# EAGLE board Audio Processor (EAGLE 5.06)
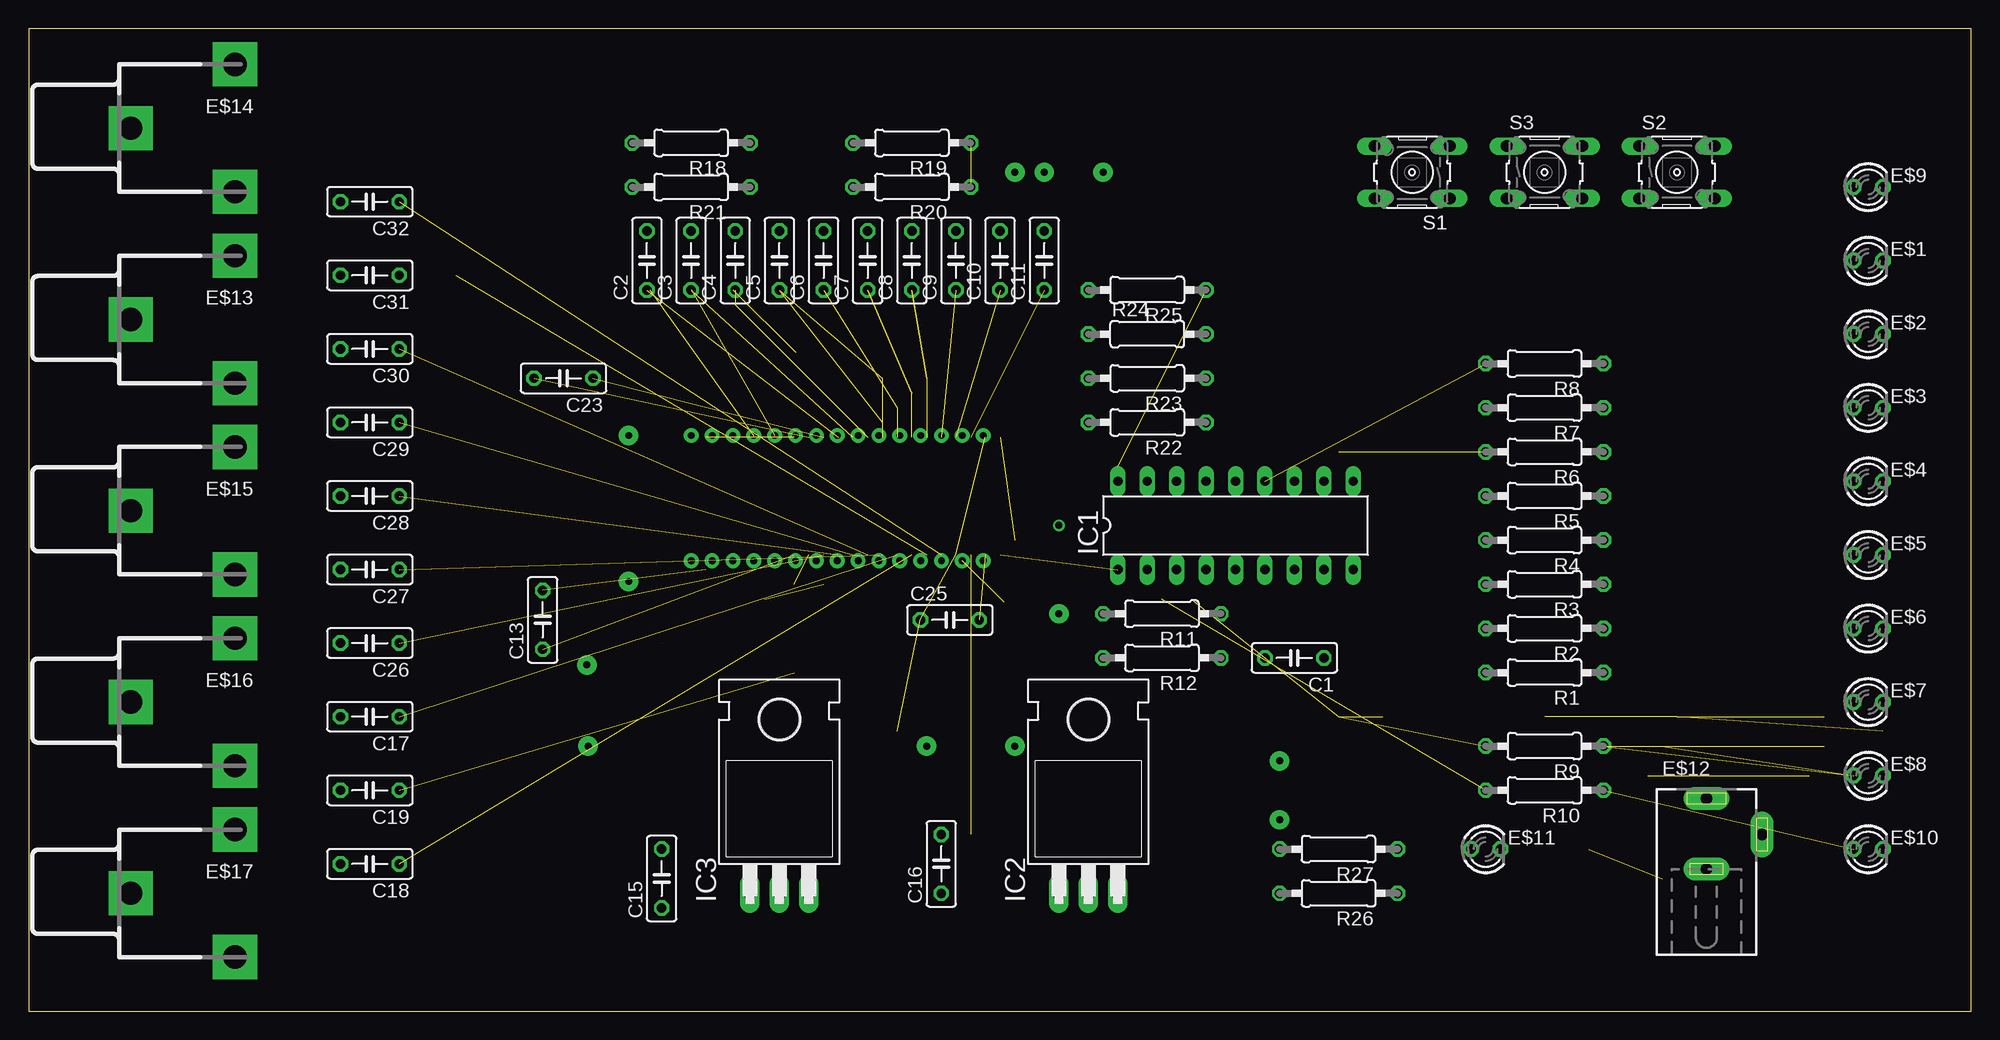
[diagram p0: board, top side]
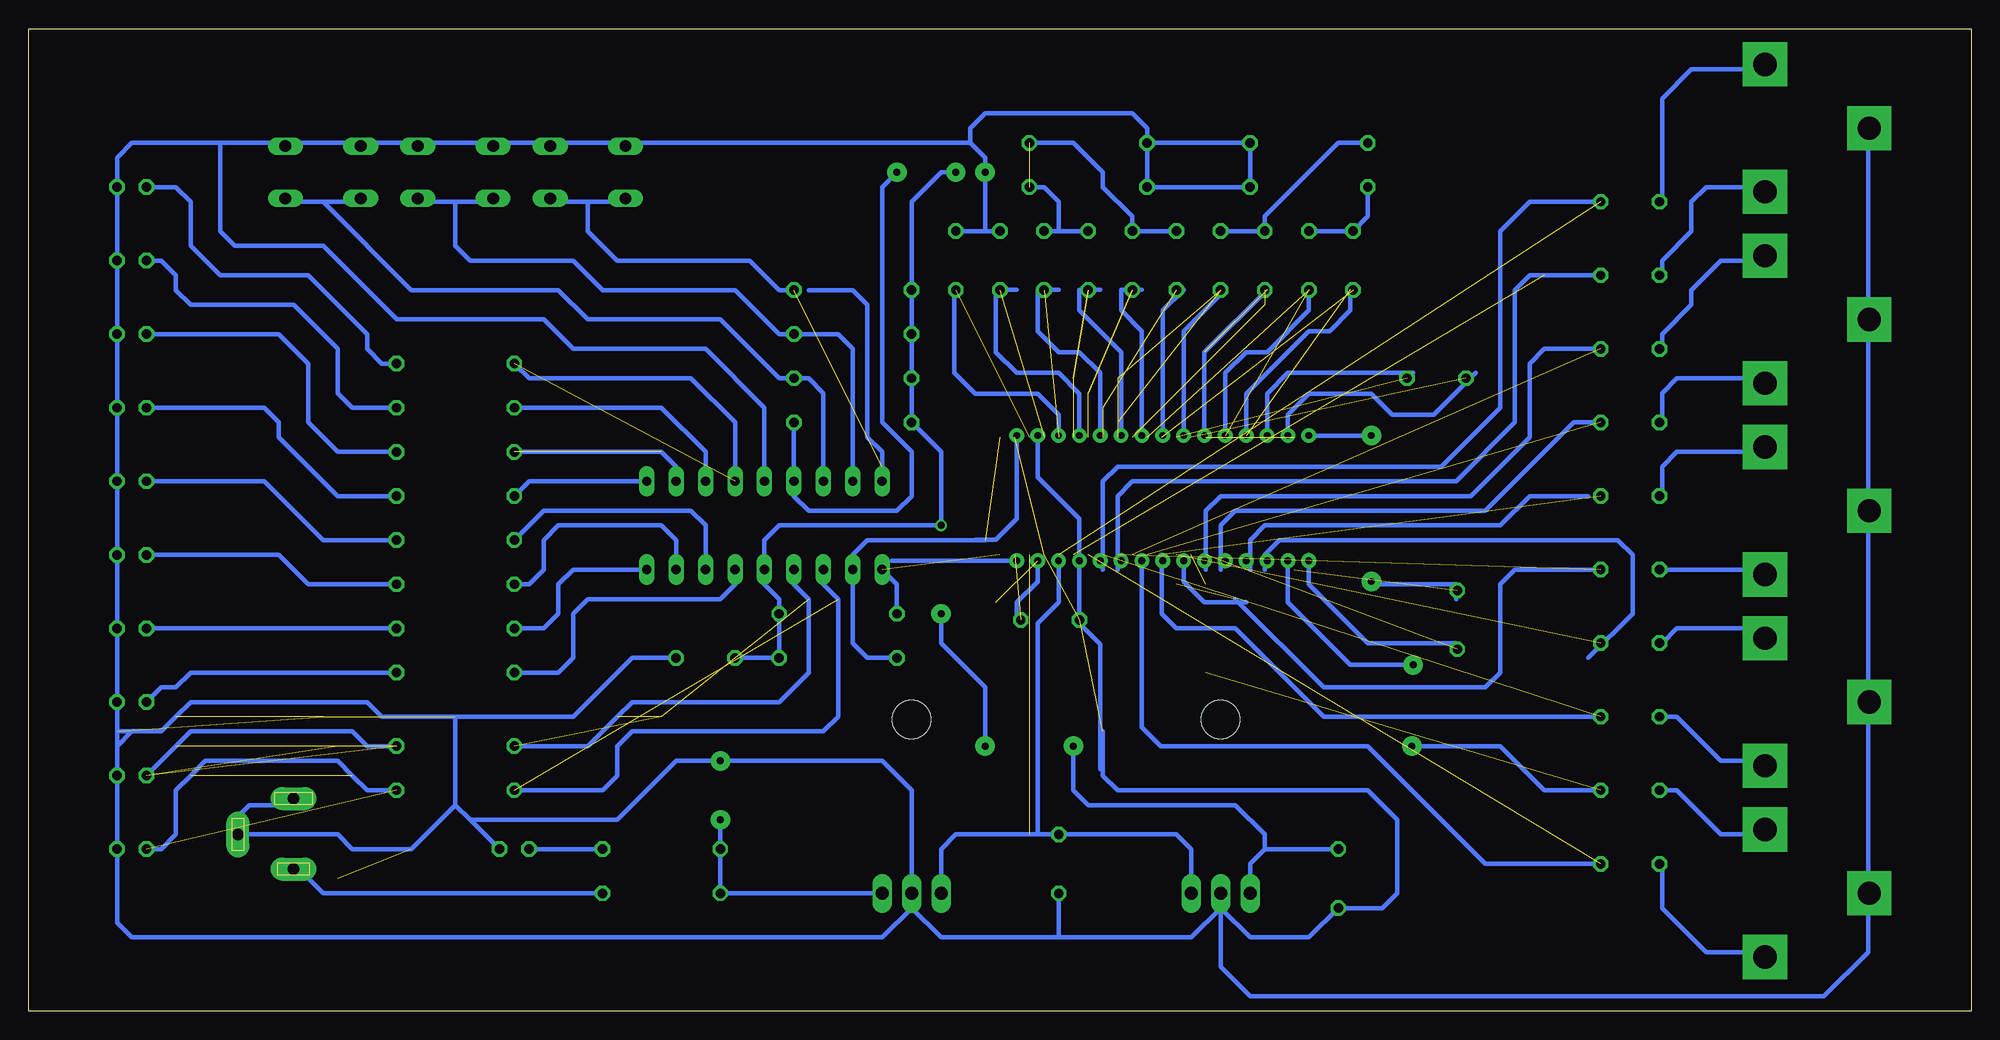
[diagram p1: board, bottom side, seen from below]

Size 167.62 x 84.76 mm. Coordinates in mm from the lower left corner, seen from the top.
Outline: 0,0 167.62,0 167.62,84.76 0,84.76 0,0
Copper layers (1*16): Top 0.035mm / dielectric 1.5mm / Bottom 0.035mm
Design rules "default": minimum track width 10mil, minimum drill 24mil, track to track 8mil, track to pad 8mil, pad to pad 8mil, via to via 8mil, smd to smd 8mil, copper to edge 40mil, drill to drill 8mil, minimum pad ring 10mil, minimum via ring 8mil, stop-mask expansion 4mil, vias tented up to drill 0mil, thermal gap 10mil

## Footprints (pad centres in the part's own frame; a part is rotated, then mirrored left to right if it is on the bottom)
C050-025X075 = drill 0.813 octagon: 1 -2.54,0; 2 2.54,0
LED3MM = drill 0.813 octagon: A -1.27,0; K 1.27,0
DCJ0202 = drill 1 pad 2 long: 1 0,3.1; 2 4.8,0; 3 0,-3
736880-49 = drill 2 pad 3.81 square: 1 -3.92,0; 2 5.08,5.5; 2@2 5.08,-5.5
DIL18 = drill 0.813 long: 1 -10.16,-3.81; 2 -7.62,-3.81; 3 -5.08,-3.81; 4 -2.54,-3.81; 5 0,-3.81; 6 2.54,-3.81; 7 5.08,-3.81; 8 7.62,-3.81; 9 10.16,-3.81; 10 10.16,3.81; 11 7.62,3.81; 12 5.08,3.81; 13 2.54,3.81; 14 0,3.81; 15 -2.54,3.81; 16 -5.08,3.81; 17 -7.62,3.81; 18 -10.16,3.81
TO220H = drill 1.118 long: 1 -2.54,-10.16; 2 0,-10.16; 3 2.54,-10.16 | hole 3.302: 0,4.826
0207/10 = drill 0.813 octagon: 1 -5.08,0; 2 5.08,0
B3F-10XX = drill 1.016 long: 1 -3.251,2.261; 2 3.251,2.261; 3 -3.251,-2.261; 4 3.251,-2.261

## Placement (x,y rotation side)
C1  [C050-025X075]  109.22,30.48 180 top
C2  [C050-025X075]  53.34,64.77 90 top
C3  [C050-025X075]  57.15,64.77 90 top
C4  [C050-025X075]  60.96,64.77 90 top
C5  [C050-025X075]  64.77,64.77 90 top
C6  [C050-025X075]  68.58,64.77 90 top
C7  [C050-025X075]  72.39,64.77 90 top
C8  [C050-025X075]  76.2,64.77 90 top
C9  [C050-025X075]  80.01,64.77 90 top
C10  [C050-025X075]  83.82,64.77 90 top
C11  [C050-025X075]  87.63,64.77 90 top
C13  [C050-025X075]  44.34,33.76 90 top
C15  [C050-025X075]  54.61,11.43 90 top
C16  [C050-025X075]  78.74,12.7 90 top
C17  [C050-025X075]  29.42,25.4 180 top
C18  [C050-025X075]  29.42,12.7 180 top
C19  [C050-025X075]  29.42,19.05 180 top
C23  [C050-025X075]  46.14,54.61 180 top
C25  [C050-025X075]  79.48,33.76 0 top
C26  [C050-025X075]  29.42,31.75 180 top
C27  [C050-025X075]  29.42,38.1 180 top
C28  [C050-025X075]  29.42,44.45 180 top
C29  [C050-025X075]  29.42,50.8 180 top
C30  [C050-025X075]  29.42,57.15 180 top
C31  [C050-025X075]  29.42,63.5 180 top
C32  [C050-025X075]  29.42,69.85 180 top
E$1  [LED3MM]  158.75,64.77 0 top
E$2  [LED3MM]  158.75,58.42 0 top
E$3  [LED3MM]  158.75,52.07 0 top
E$4  [LED3MM]  158.75,45.72 0 top
E$5  [LED3MM]  158.75,39.37 0 top
E$6  [LED3MM]  158.75,33.02 0 top
E$7  [LED3MM]  158.75,26.67 0 top
E$8  [LED3MM]  158.75,20.32 0 top
E$9  [LED3MM]  158.75,71.12 0 top
E$10  [LED3MM]  158.75,13.97 0 top
E$11  [LED3MM]  125.73,13.97 0 top
E$12  [DCJ0202]  144.78,15.24 0 top
E$13  [736880-49]  12.7,59.69 0 top
E$14  [736880-49]  12.7,76.2 0 top
E$15  [736880-49]  12.7,43.18 0 top
E$16  [736880-49]  12.7,26.67 0 top
E$17  [736880-49]  12.7,10.16 0 top
IC1  PIC18F1220P  [DIL18]  104.14,41.91 0 top
IC2  7805T  [TO220H]  91.44,20.32 0 top
IC3  7805T  [TO220H]  64.77,20.32 0 top
R1  [0207/10]  130.81,29.21 180 top
R2  [0207/10]  130.81,33.02 180 top
R3  [0207/10]  130.81,36.83 180 top
R4  [0207/10]  130.81,40.64 180 top
R5  [0207/10]  130.81,44.45 180 top
R6  [0207/10]  130.81,48.26 180 top
R7  [0207/10]  130.81,52.07 180 top
R8  [0207/10]  130.81,55.88 180 top
R9  [0207/10]  130.81,22.86 180 top
R10  [0207/10]  130.81,19.05 180 top
R11  [0207/10]  97.79,34.29 180 top
R12  [0207/10]  97.79,30.48 180 top
R18  [0207/10]  57.15,74.93 180 top
R19  [0207/10]  76.2,74.93 180 top
R20  [0207/10]  76.2,71.12 180 top
R21  [0207/10]  57.15,71.12 180 top
R22  [0207/10]  96.52,50.8 180 top
R23  [0207/10]  96.52,54.61 180 top
R24  [0207/10]  96.52,58.42 0 top
R25  [0207/10]  96.52,62.23 180 top
R26  [0207/10]  113.03,10.16 180 top
R27  [0207/10]  113.03,13.97 180 top
S1  [B3F-10XX]  119.38,72.39 180 top
S2  [B3F-10XX]  142.24,72.39 0 top
S3  [B3F-10XX]  130.81,72.39 0 top

## Library data of the parts
C1-C11 C13 C15-C19 C23 C25-C32 = resistor
E$1-E$11 = led
E$12 = con-jack
E$13-E$17 = con-conrad
IC1 = microchip
IC2 IC3 = linear
R1-R12 R18-R27 = rcl
S1-S3 = switch-omron

## Nets
N$50: C1.1 C10.2 C11.2 C15.1 C16.1 C25.1 E$9.K E$11.K IC1.14 IC2.2 IC3.2 R18.1 R19.2 R20.2 R21.1
N$51: C6.2 C7.2 C8.2 C9.2 R19.1 R20.1
S$1: IC1.10 R5.2
S$2: IC1.11 R6.2
S$3: IC1.12 R7.2
S$4: IC1.15 R22.1
S$5: IC1.7 R4.2
S$6: IC1.8 R3.2
S$7: IC1.9 R2.2
S$8: IC1.6 R1.2
S$9: IC1.4 R9.2
S$10: E$2.A R6.1
S$11: E$1.A R7.1
S$12: E$9.A R8.1
S$13: E$3.A R5.1
S$14: E$4.A R4.1
S$15: E$5.A R3.1
S$16: E$6.A R2.1
S$17: E$7.A R1.1
S$18: E$8.A R9.1
S$19: E$10.A R10.1
S$20: R26.1
S$21: IC1.13 R8.2
S$22: C15.2 IC3.1
S$23: IC1.3 R10.2
S$24: C10.1
S$25: E$11.A R27.1
S$26: IC1.1 R11.2
S$27: C9.1
S$28: IC2.3 R26.2 R27.2
S$29: C25.2
S$30: IC2.1 IC3.3
S$31: R25.1
S$33: C29.1
S$34: C13.2
S$35: C18.1
S$37: C28.1
S$38: C27.1
S$39: C26.1
S$41: C30.1
S$42: C13.1
S$44: C17.1
S$45: C19.1
S$46: C23.1
S$47: C2.1
S$48: C3.1
S$49: C23.2
S$54: C32.1
S$55: C8.1
S$56: C7.1
S$57: IC1.2 R12.2
S$59: IC1.16 R23.1
S$60: C6.1
S$61: C5.1
S$62: C2.2 C3.2 R21.2
S$63: IC1.18
S$64: C4.2 C5.2 R18.2
S$65: C11.1
S$66: IC1.17 R24.2
S$67: C4.1
VSS: C1.2 IC1.5 R12.1 R22.2 R25.2

## Tracks (layer width: path | path; a pad name or v marks a point on that pad's centre or on a via)
N$50  (via drill 0.6 pad 1.68)  (10 unrouted)
  Bottom 0.406: R19.2 R20.2 R21.1 R18.1 R19.2 | R19.2 71.12,76.2 72.39,77.47 85.09,77.47 86.36,76.2 86.36,74.93 | IC1.14 104.14,52.07 109.22,57.15 120.65,57.15 123.19,59.69 135.89,59.69 142.24,66.04 149.86,66.04 151.13,67.31 151.13,74.93 | 151.13,74.93 158.75,74.93 160.02,73.66 160.02,69.85 | C1.1 115.57,30.48 120.65,25.4 130.81,25.4 | 160.02,69.85 E$9.K | 160.02,24.13 160.02,69.85 | 160.02,22.86 160.02,7.62 158.75,6.35 93.98,6.35 91.44,8.89 | 91.44,8.89 88.9,6.35 78.74,6.35 | 78.74,6.35 67.31,6.35 64.77,8.89 | 64.77,8.89 IC3.2 | 64.77,8.89 62.23,6.35 57.15,6.35 C15.1 50.8,8.89 49.53,10.16 49.53,16.51 52.07,19.05 73.66,19.05 74.93,20.32 74.93,24.13 | 91.44,8.89 IC2.2 91.44,19.05 93.98,21.59 v107.95,21.59 111.76,21.59 116.84,16.51 129.54,16.51 | 130.81,25.4 130.81,17.78 | 130.81,17.78 134.62,13.97 139.7,13.97 140.97,15.24 149.86,15.24 149.86,16.51 148.59,17.78 144.78,17.78 | 78.74,6.35 C16.1 | 151.13,74.93 86.36,74.93 | 86.36,74.93 85.09,73.66 v85.09,72.39 85.09,67.31 | 85.09,67.31 C10.2 | 85.09,67.31 C11.2 | E$11.K 129.54,16.51 | 129.54,16.51 130.81,17.78 | 158.75,24.13 156.21,24.13 154.94,25.4 153.67,26.67 138.43,26.67 137.16,25.4 130.81,25.4 | 158.75,24.13 160.02,22.86 | 160.02,22.86 160.02,24.13 | 158.75,24.13 160.02,24.13 | 8.89,76.2 8.89,5.08 12.7,1.27 62.23,1.27 64.77,3.81 64.77,8.89
N$51  (1 unrouted)
  Bottom 0.406: R20.1 80.01,71.12 78.74,69.85 78.74,67.31 | C9.2 78.74,67.31 | 78.74,67.31 C8.2 | R19.1 77.47,74.93 74.93,72.39 74.93,71.12 72.39,68.58 C7.2 C6.2
S$1
  Bottom 0.406: IC1.10 124.46,45.72 R5.2
S$2  (1 unrouted)
  Bottom 0.406: IC1.11 111.76,46.99 113.03,48.26 R6.2
S$3
  Bottom 0.406: IC1.12 109.22,48.26 113.03,52.07 R7.2
S$4  (via drill 0.6 pad 1.68)
  Bottom 0.406: R22.1 IC1.15 101.6,44.45 100.33,43.18 92.71,43.18 91.44,44.45 91.44,48.26 93.98,50.8 93.98,71.12 v92.71,72.39
S$5
  Bottom 0.406: R4.2 123.19,43.18 110.49,43.18 109.22,41.91 IC1.7
S$6
  Bottom 0.406: IC1.8 111.76,40.64 113.03,41.91 121.92,41.91 123.19,40.64 123.19,38.1 124.46,36.83 R3.2
S$7
  Bottom 0.406: IC1.9 120.65,38.1 121.92,36.83 121.92,34.29 123.19,33.02 R2.2
S$8
  Bottom 0.406: IC1.6 106.68,36.83 107.95,35.56 119.38,35.56 120.65,34.29 120.65,30.48 121.92,29.21 R1.2
S$9  (3 unrouted)
  Bottom 0.406: IC1.4 101.6,36.83 100.33,35.56 100.33,29.21 102.87,26.67 115.57,26.67 116.84,25.4 119.38,22.86 R9.2
S$10
  Bottom 0.406: R6.1 140.97,48.26 143.51,50.8 143.51,55.88 146.05,58.42 E$2.A
S$11
  Bottom 0.406: R7.1 139.7,52.07 140.97,53.34 140.97,57.15 144.78,60.96 153.67,60.96 154.94,62.23 154.94,63.5 156.21,64.77 E$1.A
S$12
  Bottom 0.406: R8.1 137.16,55.88 138.43,57.15 138.43,58.42 143.51,63.5 151.13,63.5 153.67,66.04 153.67,69.85 154.94,71.12 E$9.A
S$13
  Bottom 0.406: R5.1 140.97,44.45 146.05,49.53 146.05,50.8 147.32,52.07 E$3.A
S$14
  Bottom 0.406: R4.1 142.24,40.64 147.32,45.72 E$4.A
S$15
  Bottom 0.406: R3.1 143.51,36.83 146.05,39.37 E$5.A
S$16
  Bottom 0.406: R2.1 E$6.A
S$17
  Bottom 0.406: R1.1 153.67,29.21 154.94,27.94 156.21,27.94 E$7.A
S$18  (4 unrouted)
  Bottom 0.406: E$8.A 154.94,22.86 153.67,24.13 139.7,24.13 138.43,22.86 R9.1
S$19  (2 unrouted)
  Bottom 0.406: R10.1 138.43,19.05 139.7,20.32 140.97,21.59 152.4,21.59 153.67,20.32 154.94,19.05 154.94,15.24 156.21,13.97 E$10.A
S$20
  Bottom 0.406: 144.78,12.7 142.24,10.16 R26.1
S$21  (1 unrouted)
  Bottom 0.406: 106.68,46.99 106.68,50.8 110.49,54.61 124.46,54.61 R8.2
S$22  (via drill 0.6 pad 1.68)
  Bottom 0.406: C15.2 60.96,13.97 | 60.96,13.97 62.23,12.7 IC3.1 | 60.96,13.97 60.96,15.24 63.5,17.78 76.2,17.78 77.47,19.05 v77.47,22.86
S$23  (1 unrouted)
  Bottom 0.406: IC1.3 99.06,36.83 97.79,35.56 97.79,25.4 99.06,24.13 115.57,24.13 116.84,22.86 116.84,20.32 118.11,19.05 R10.2
S$24  (2 unrouted)
S$25
  Bottom 0.406: R27.1 E$11.A
S$26  (2 unrouted)
  Bottom 0.406: R11.2 92.71,36.83 IC1.1
S$27  (2 unrouted)
S$28  (via drill 0.6 pad 1.68)
  Bottom 0.406: v107.95,16.51 R27.2 R26.2 IC2.3
S$29  (2 unrouted)
S$30  (2 unrouted)
  Bottom 0.406: IC3.3 67.31,13.97 68.58,15.24 81.28,15.24 87.63,15.24 88.9,13.97 IC2.1
S$31  (1 unrouted)
  Bottom 0.406: R25.1 102.87,62.23 105.41,64.77 116.84,64.77 119.38,67.31 119.38,69.85 | 123.19,69.85 119.38,69.85 | 119.38,69.85 115.57,69.85
S$32  (2 unrouted)
S$33  (2 unrouted)
S$34  (2 unrouted)
S$35  (2 unrouted)
S$36  (1 unrouted)
S$37  (2 unrouted)
S$38  (2 unrouted)
S$39  (2 unrouted)
S$40  (1 unrouted)
S$41  (2 unrouted)
S$42  (2 unrouted)
S$43  (3 unrouted)
S$44  (2 unrouted)
S$45  (2 unrouted)
S$46  (2 unrouted)
S$47  (2 unrouted)
S$48  (2 unrouted)
S$49  (2 unrouted)
S$50  (1 unrouted)
S$51  (1 unrouted)
S$52  (3 unrouted)
S$53  (1 unrouted)
S$54  (2 unrouted)
S$55  (4 unrouted)
S$56  (4 unrouted)
S$57  (2 unrouted)
  Bottom 0.406: 85.09,40.64 95.25,40.64 96.52,39.37 IC1.2 96.52,31.75 95.25,30.48 R12.2
S$58  (via drill 0.6 pad 1.68)
  Bottom 0.406: v85.09,22.86 85.09,27.94 88.9,31.75 v88.9,34.29
S$59
  Bottom 0.406: IC1.16 99.06,53.34 100.33,54.61 R23.1 102.87,54.61 107.95,59.69 119.38,59.69 121.92,62.23 134.62,62.23 142.24,69.85 | 142.24,69.85 146.05,69.85 | 138.43,69.85 142.24,69.85
S$60  (4 unrouted)
S$61  (5 unrouted)
S$62
  Bottom 0.406: C3.2 C2.2 52.07,68.58 R21.2
S$63
  Bottom 0.406: 100.33,62.23 96.52,62.23 95.25,60.96 95.25,49.53 93.98,48.26 IC1.18
S$64
  Bottom 0.406: R18.2 54.61,74.93 60.96,68.58 C4.2 C5.2
S$65  (2 unrouted)
S$66
  Bottom 0.406: 130.81,69.85 130.81,66.04 129.54,64.77 120.65,64.77 118.11,62.23 106.68,62.23 102.87,58.42 R24.2 97.79,58.42 96.52,57.15 IC1.17 | 130.81,69.85 133.35,69.85 | 130.81,69.85 127,69.85 | 130.81,69.85 134.62,69.85
S$67  (4 unrouted)
S$68  (via drill 0.6 pad 1.27)
  Bottom 0.406: v82.36,49.67 82.36,42.47 84.16,40.67 85.96,40.67
S$69  (via drill 0.6 pad 1.27)
  Bottom 0.406: 87.76,62.27 87.76,55.07 85.96,53.27 80.56,53.27 78.76,51.47 v78.76,49.67
S$70  (via drill 0.6 pad 1.27)  (1 unrouted)
  Bottom 0.406: v66.16,49.67 66.16,56.87 60.76,62.27
S$71  (via drill 0.6 pad 1.27)  (1 unrouted)
  Bottom 0.406: v64.36,49.67 64.36,55.07 62.56,56.87 60.76,56.87 57.16,60.47 57.16,62.27
S$72  (via drill 0.6 pad 1.27)
  Bottom 0.406: 48.16,55.07 58.96,55.07 60.76,53.27 v60.76,49.67
S$73  (via drill 0.6 pad 1.27)
  Bottom 0.406: v73.36,49.67 73.36,56.87 76.96,60.47 76.96,62.27 75.16,62.27
S$74  (via drill 0.6 pad 1.27)
  Bottom 0.406: v71.56,49.67 71.56,58.67 73.36,60.47 73.36,62.27 71.56,62.27
S$75  (via drill 0.6 pad 1.27)
  Bottom 0.406: v69.76,49.67 69.76,60.47 67.96,62.27
S$76  (via drill 0.6 pad 1.27)
  Bottom 0.406: v67.96,49.67 67.96,58.67 64.36,62.27
S$77  (via drill 0.6 pad 1.27, 0.6 pad 1.68)
  Bottom 0.406: v51.76,49.67 v57.16,49.67
S$78  (via drill 0.6 pad 1.68)
  other vias: 51.76,37.07
S$79
  Bottom 0.406: 31.75,69.85 38.1,69.85 40.64,67.31 40.64,52.07 45.72,46.99 73.66,46.99 74.93,45.72 74.93,38.1
S$80
  Bottom 0.406: 31.75,63.5 38.1,63.5 39.37,62.23 39.37,50.8 44.45,45.72 72.39,45.72 73.66,44.45 73.66,38.1
S$81  (via drill 0.6 pad 1.27)
  Bottom 0.406: v58.96,49.67 58.96,51.47 57.16,53.27 51.76,53.27 49.96,51.47 46.36,51.47 42.76,55.07
S$82
  Bottom 0.406: 31.75,57.15 36.83,57.15 38.1,55.88 38.1,49.53 43.18,44.45 64.77,44.45 66.04,43.18 66.04,38.1
S$83  (via drill 0.6 pad 1.27)
  other vias: 57.16,38.87
S$84  (via drill 0.6 pad 1.27)
  Bottom 0.406: 31.75,12.7 41.91,12.7 52.07,22.86 69.95,22.86 71.56,24.47 v71.56,38.87
S$85  (via drill 0.6 pad 1.27)
  other vias: 60.76,38.87
S$86  (via drill 0.6 pad 1.27)
  other vias: 62.56,38.87
S$87  (via drill 0.6 pad 1.27)
  other vias: 64.36,38.87
S$88  (via drill 0.6 pad 1.27)
  other vias: 66.16,38.87
S$89  (via drill 0.6 pad 1.27)
  Bottom 0.406: v67.96,38.87 67.96,37.07 66.16,35.27 62.56,35.27
S$90  (via drill 0.6 pad 1.27)
  other vias: 69.76,38.87
S$91
  Bottom 0.406: 19.05,82.55 17.78,81.28 24.13,81.28 26.67,78.74 26.67,69.85
S$92  (via drill 0.6 pad 1.27)
  other vias: 73.36,38.87
S$93  (via drill 0.6 pad 1.27)
  other vias: 75.16,38.87
S$94  (via drill 0.6 pad 1.27)
  Bottom 0.406: 75.16,20.87 75.16,31.67 76.96,33.47 v76.96,38.87 76.96,42.47 80.56,46.07 v80.56,49.67
S$95  (via drill 0.6 pad 1.27)
  Bottom 0.406: v78.76,38.87 78.76,35.27 80.56,33.47 80.56,15.47
S$96  (via drill 0.6 pad 1.27)  (1 unrouted)
  Bottom 0.406: v80.56,38.87 80.56,37.07 82.36,35.27 82.36,33.47
S$97  (via drill 0.6 pad 1.27)
  Bottom 0.406: v82.36,38.87 93.16,38.87
S$98  (1 unrouted)
S$99  (via drill 0.6 pad 1.27)
  Bottom 0.406: v76.96,49.67 76.96,53.27 78.76,55.07 82.36,55.07 84.16,56.87 84.16,62.27 82.36,62.27
S$100  (via drill 0.6 pad 1.27)
  Bottom 0.406: v75.16,49.67 75.16,55.07 76.96,56.87 78.76,56.87 80.56,58.67 80.56,62.27 78.76,62.27
S$101  (via drill 0.6 pad 1.27)  (1 unrouted)
  Bottom 0.406: 53.56,62.27 53.56,60.47 55.36,58.67 57.16,58.67 62.56,53.27 v62.56,49.67
S$102
  Bottom 0.406: 31.75,50.8 34.29,50.8 41.91,43.18 63.5,43.18 64.77,41.91 64.77,38.1
S$103
  Bottom 0.406: 33.02,44.45 38.1,44.45 40.64,41.91 60.96,41.91 62.23,40.64 62.23,38.1
S$104
  Bottom 0.406: 44.45,31.75 52.07,31.75 57.15,36.83 57.15,39.37
S$105  (1 unrouted)
  Bottom 0.406: 31.75,38.1 39.37,38.1 40.64,36.83 40.64,29.21 41.91,27.94 55.88,27.94 63.5,35.56
S$106  (1 unrouted)
S$107
  Bottom 0.406: 33.02,30.48 29.21,34.29 29.21,39.37 30.48,40.64 59.69,40.64 60.96,39.37 60.96,38.1
S$108
  Bottom 0.406: 31.75,25.4 55.88,25.4 63.5,33.02 68.58,33.02 69.85,34.29 69.85,39.37
S$109  (via drill 0.6 pad 1.27, 0.6 pad 1.68)
  Bottom 0.406: v48.16,29.87 53.56,29.87 58.96,35.27 v58.96,38.87
S$110
  Bottom 0.406: 52.07,36.83 44.45,36.83 44.45,35.56
S$111  (via drill 0.6 pad 1.68)
  Bottom 0.406: 31.75,19.05 36.83,19.05 40.64,22.86 v48.26,22.86
S$112
  Bottom 0.406: 19.05,71.12 22.86,71.12 24.13,69.85 24.13,67.31 26.67,64.77 26.67,63.5
S$113
  Bottom 0.406: 17.78,64.77 21.59,64.77 24.13,62.23 24.13,60.96 26.67,58.42 26.67,57.15
S$114
  Bottom 0.406: 19.05,54.61 25.4,54.61 26.67,53.34 26.67,50.8
S$115
  Bottom 0.406: 17.78,48.26 25.4,48.26 26.67,46.99 26.67,44.45
S$116
  Bottom 0.406: 17.78,38.1 26.67,38.1
S$117
  Bottom 0.406: 17.78,33.02 25.4,33.02 26.67,31.75
S$118
  Bottom 0.406: 17.78,21.59 21.59,21.59 25.4,25.4 26.67,25.4
S$119
  Bottom 0.406: 17.78,15.24 21.59,15.24 25.4,19.05 26.67,19.05
S$120
  Bottom 0.406: 17.78,5.08 22.86,5.08 26.67,8.89 26.67,12.7
VSS  (via drill 0.6 pad 1.02, 0.6 pad 1.68)
  Bottom 0.406: C1.2 R12.1 102.87,35.56 104.14,36.83 IC1.5 104.14,40.64 102.87,41.91 v88.9,41.91 88.9,48.26 R22.2 R25.2 91.44,69.85 88.9,72.39 v87.63,72.39